# Altium PCB mcu.PcbDoc (part 1 of 2)
Units mil, origin at the board's own origin, x right, y up, seen from the top; angles counter-clockwise.
Board outline 3937.01 x 3937.01 mil, 2 copper layers (Top Layer, Bottom Layer); 92 components, 130 nets, 532 pads, 60 vias.
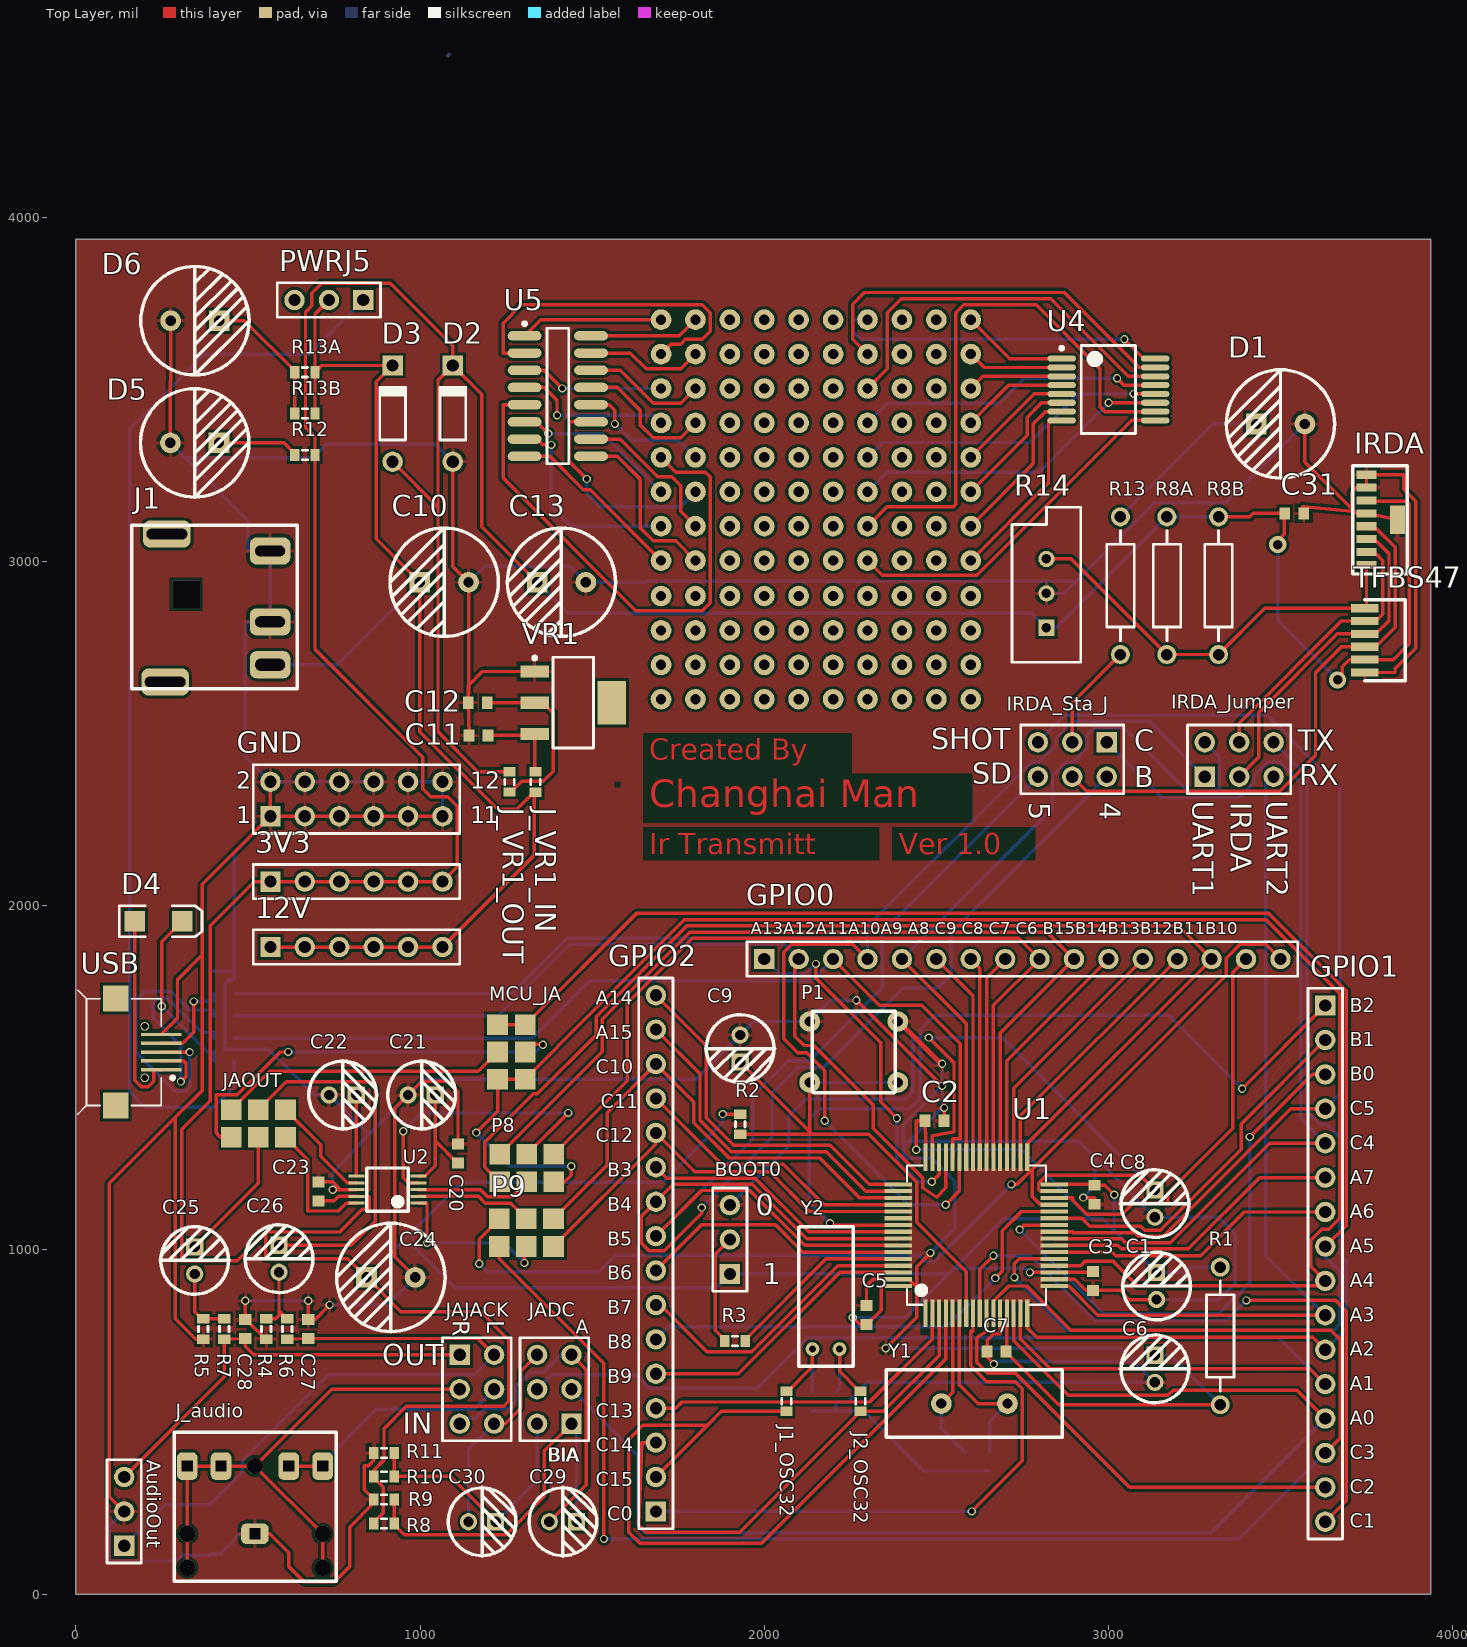
[diagram p0: Top Layer view]
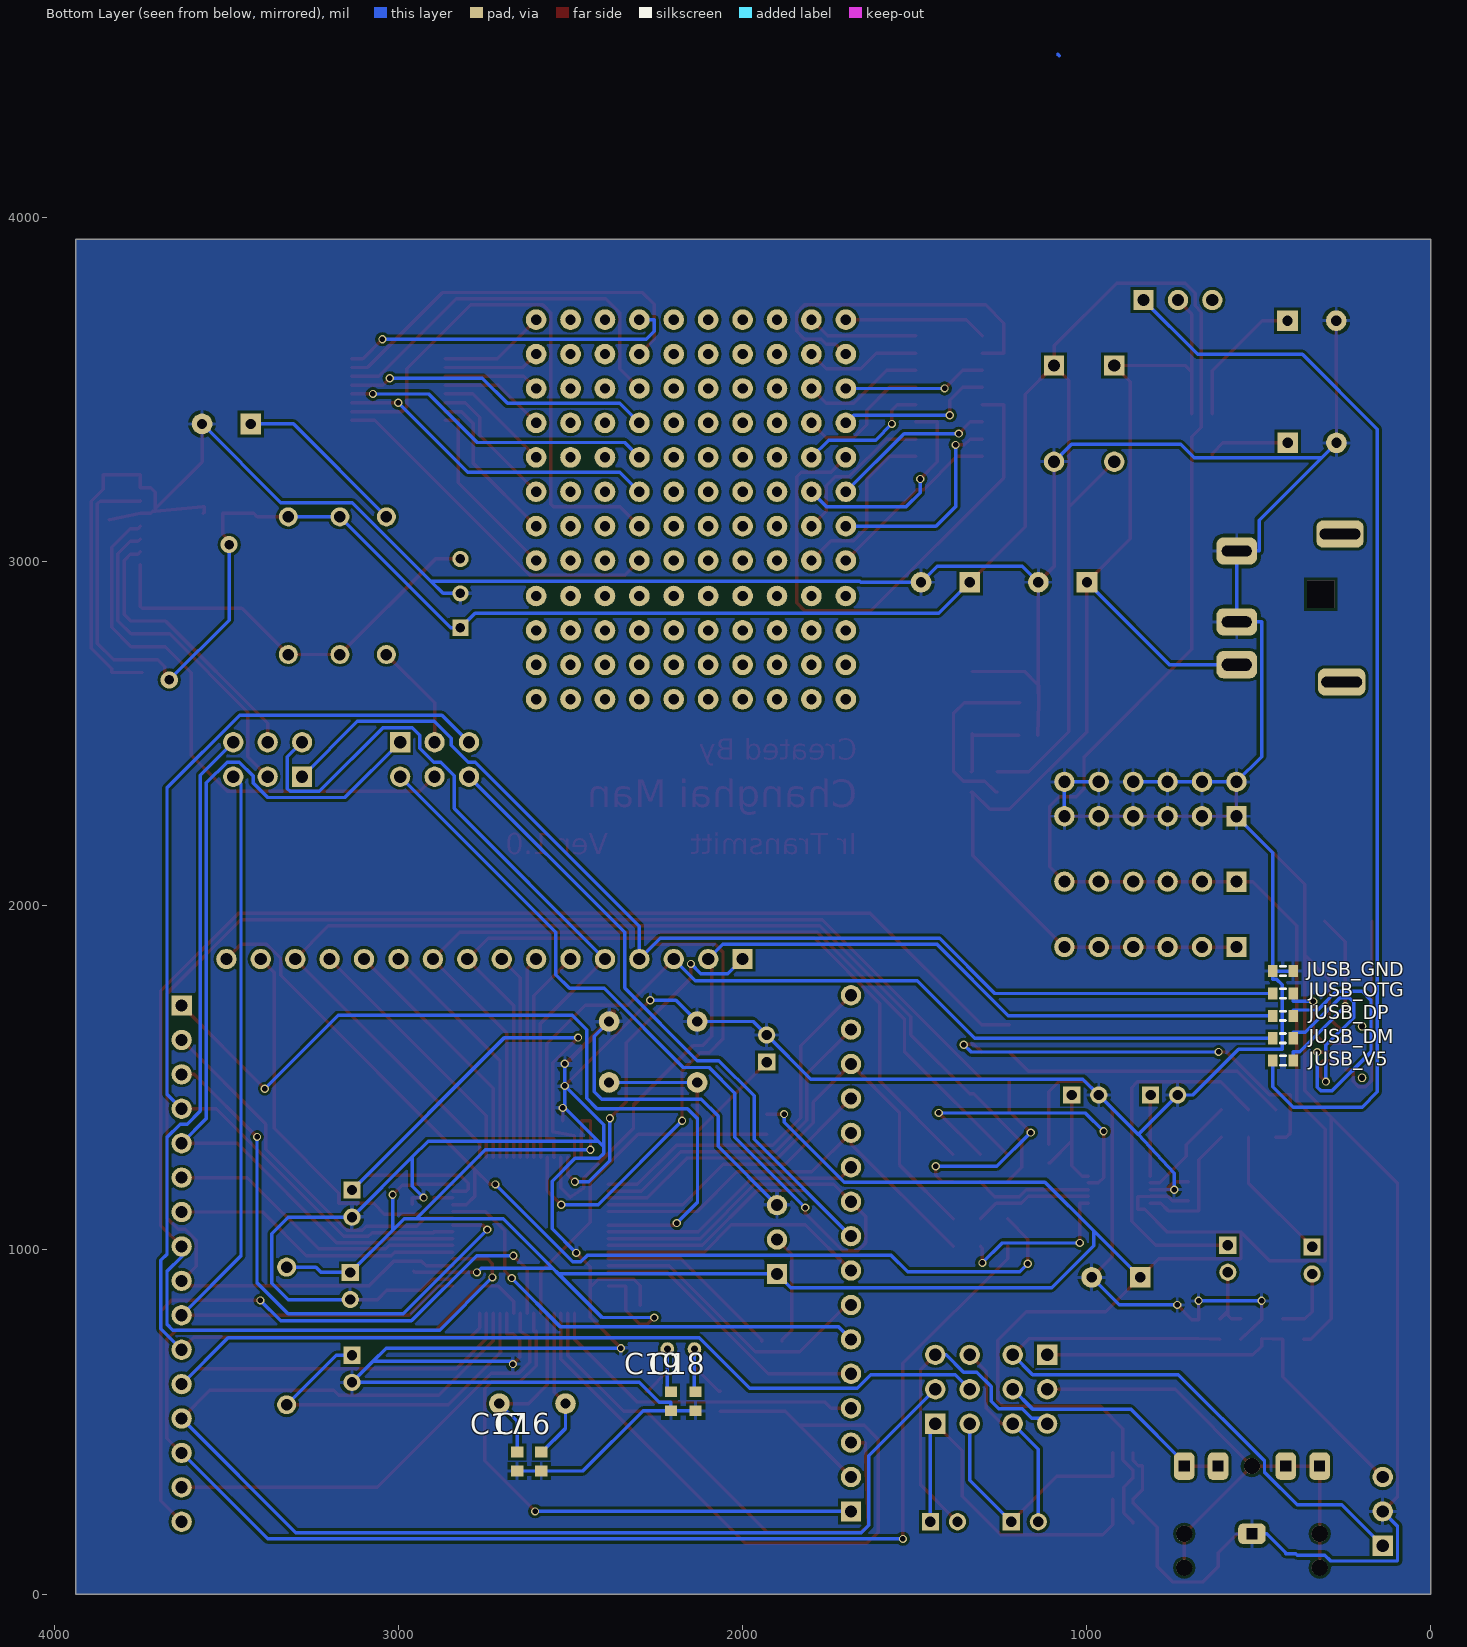
[diagram p1: Bottom Layer view, seen from below]

## Layer stack, top to bottom
Top Solder: solder mask 0.4, Solder Resist, Dk 3.5
Top Layer: signal copper 1.4
Dielectric 1: dielectric 12.6, FR-4, Dk 4.8
Bottom Layer: signal copper 1.4
Bottom Solder: solder mask 0.4, Solder Resist, Dk 3.5

## Board outline
0,0 0,3937.01 3937.01,3937.01 3937.01,0

## Design rules (kind name [scope] priority, off if disabled: settings)
AssemblyTestpoint [All] p1: testpointundercomponent=TRUE minsize=30 maxsize=100 preferedsize=40 minholesize=0 maxholesize=40 preferedholesize=32 testpointgrid=1 usegrid=TRUE gridtolerance=0.01 allowsidetop=TRUE allowsidebottom=TRUE
Clearance [All] p1: gap=8 ignorepadtopadclearanceinfootprint=FALSE except(0: Arc-Hole Track-Hole SMDPad-Hole THPad-Hole Via-Hole Fill-Hole Poly-Hole Region-Hole Text-Hole)
FabricationTestpoint [All] p1: side=3 testpointundercomponent=TRUE minsize=30 maxsize=100 preferedsize=40 minholesize=0 maxholesize=40 preferedholesize=32 testpointgrid=1 allowsidetop=TRUE allowsidebottom=TRUE usegrid=TRUE gridtolerance=0.01
PolygonConnect [All] p1: connectstyle=Relief reliefconductorwidth=10 reliefentries=4 polygonreliefangle="90 Angle" airgapwidth=10
RoutingVias [All] p1: holewidth=16 width=24 viastyle="Through Hole" minholewidth=14 minwidth=20 maxholewidth=28 maxwidth=50
SolderMaskExpansion [All] p1: expansion=4
Width [All] p1: maxlimit=10 minlimit=10 preferedwidth=10
28 further rules are at their usual default settings.

## Classes and differential pairs
component class GPIO: GPIO0 GPIO1 GPIO2
component class power: 3V3 12V C10 C11 C12 C13 D2 D3 D5 D6 GND J1 J_VR1_IN J_VR1_OUT PWRJ5 R12 R13A R13B VR1
component class irda: C31 D1 IRDA IRDA_Jumper IRDA_Sta_J R8A R8B R13 R14 TFBS4711
component class mcuCore: BOOT0 C1 C2 C3 C4 C5 C6 C7 C8 C9 C16 C17 C18 C19 D4 J1_OSC32 J2_OSC32 JUSB_DM JUSB_DP JUSB_GND JUSB_OTG JUSB_V5 P1 P2 R1 R2 R3 U1 USB Y1 Y2
component class audio: AudioOut C20 C21 C22 C23 C24 C25 C26 C27 C28 C29 C30 J_audio JADC JAJACK JAOUT MCU_JA P8 P9 R4 R5 R6 R7 R8 R9 R10 R11 U2

## Components (designator, comment, footprint, x,y, rotation, side; value= is the part's Value field where it differs from the comment)
3V3 "3V3" HDR1X6 565,2070 r0 top
12V "12V" HDR1X6 565,1880 r0 top
AudioOut "Header 3" HDR1X3 140,140 r90 top
BOOT0 "Header 3" HDR1X3 1900,930 r90 top
C1 "Cap2" Cap5x10 3140,895 r270 top value=10uF
C2 "Cap" 1608[0603] 2495,1375 r180 top value=100nF
C3 "Cap" 1608[0603] 2955,910 r90 top value=100nF
C4 "Cap" 1608[0603] 2960,1160 r90 top value=100nF
C5 "Cap" 1608[0603] 2297,811 r270 top value=100nF
C6 "Cap2" Cap5x10 3135,654.37 r270 top value=10uF
C7 "Cap" 1608[0603] 2675,705 r0 top value=100nF
C8 "Cap2" Cap5x10 3135,1134.37 r270 top value=10uF
C9 "Cap2" Cap5x10 1930,1585 r90 top value=10uF
C10 "Cap Pol1" Cap8*14 1070,2940 r180 top value=470uF
C11 "Cap" 1608[0603] 1170,2495 r0 top value=100nF
C12 "Cap" 1608[0603] 1167.44,2590 r0 top value=100nF
C13 "Cap Pol1" Cap8*14 1410.7,2940 r180 top value=470uF
C16 "Cap" 1608[0603] 2585,385 r90 bottom value=22pF
C17 "Cap" 1608[0603] 2655,385 r90 bottom value=22pF
C18 "Cap" 1608[0603] 2136.67,560 r90 bottom value=22pF
C19 "Cap" 1608[0603] 2208.33,560 r90 bottom value=22pF
C20 "Cap" 1608[0603] 1110,1280 r270 top value=100nF
C21 "Cap2" Cap5x10 1004.37,1450 r180 top value=10uF
C22 "Cap2" Cap5x10 775,1450 r180 top value=10uF
C23 "Cap" 1608[0603] 705,1170 r270 top value=100nF
C24 "Cap2" Cap8*14 915,920 r180 top value=470uF
C25 "Cap2" Cap5x10 345,969.37 r270 top value=10uF
C26 "Cap2" Cap5x10 590,974.37 r270 top value=10uF
C27 "Cap" 1608[0603] 675,770 r270 top value=22nF
C28 "Cap" 1608[0603] 492,770 r270 top value=22nF
C29 "Cap2" Cap5x10 1415,210 r180 top value=10uF
C30 "Cap2" Cap5x10 1180,210 r180 top value=10uF
C31 "Cap" 1608[0603] 3540,3140 r180 top value=100nF
D1 "LED0" Cap8*14 3500,3400 r180 top
D2 "Diode 1N4148" DO-35 1095,3430 r90 top
D3 "Diode 1N4148" DO-35 920,3430 r90 top
D4 "1N5819" 3.2X1.6X1.1 240,1955 r0 top
D5 "LED1" Cap8*14 345,3345 r0 top
D6 "LED1" Cap8*14 345.7,3700 r0 top
GND "GND" HDR2X6 565,2260 r0 top
GPIO0 "Header 16" HDR1X16 2000,1845 r0 top
GPIO1 "Header 16" HDR1X16 3630,1710 r270 top
GPIO2 "Header 16" HDR1X16 1685,240 r90 top
IRDA "HSDL3201" HSDL3201 3750,3121.5 r270 top
IRDA_Jumper "Header 3X2" HDR2X3 3280,2375 r0 top
IRDA_Sta_J "Header 3X2" HDR2X3 2995,2475 r180 top
J1 "PWR2.5" PCBComponent_1 564.09,2905 r90 top
J1_OSC32 "Res3" J1-0603 2065,560 r90 top value=0
J2_OSC32 "Res3" J1-0603 2280,560 r90 top value=0
J_audio "Phonejack Stereo SW" AudioJack_3F07 520,37.2 r0 top
J_VR1_IN "Res3" J1-0603 1335,2359.53 r90 top value=0
J_VR1_OUT "Res3" J1-0603 1260,2360 r90 top value=0
JADC "Header 3X2" HDR2X3 1440,495 r90 top
JAJACK "Header 3X2" HDR2X3 1115,695 r270 top
JAOUT "Header 3X2" jumper2x3 530,1407.56 r0 top
JUSB_DM "Res3" J1-0603 430,1615 r180 bottom value=0
JUSB_DP "Res3" J1-0603 430,1680 r180 bottom value=0
JUSB_GND "Res3" J1-0603 430,1810 r180 bottom value=1K
JUSB_OTG "Res3" J1-0603 430,1745 r180 bottom value=0
JUSB_V5 "Res3" J1-0603 430,1550 r180 bottom value=1K
MCU_JA "Header 3X2" jumper2x3 1225,1575 r90 top
P1 "Reset Button" DC_Jack 2260,1575 r180 top
P8 "Header 3X2" jumper2x3 1310,1277.56 r0 top
P9 "Header 3X2" jumper2x3 1308.74,1090 r0 top
PWRJ5 "Header 3" HDR1X3 835,3760 r180 top
R1 "Res2" AXIAL-0.4 3325,750 r270 top value=10
R2 "Res2" J1-0603 1930,1365 r90 top value=10K
R3 "Res2" J1-0603 1915,735 r180 top value=100
R4 "R4" J1-0603 553,770 r90 top value=10K
R5 "Res2" J1-0603 370,770 r90 top value=10K
R6 "Res2" J1-0603 614,770 r270 top value=100
R7 "Res2" J1-0603 431,770 r270 top value=100
R8 "Res2" J1-0603 895,205 r0 top value=10K
R8A "Res2" AXIAL-0.4 3170,2930 r90 top value=100
R8B "Res2" AXIAL-0.4 3320,2930 r90 top value=100
R9 "Res2" J1-0603 895,275 r180 top value=10K
R10 "Res2" J1-0603 895,341.67 r0 top value=10K
R11 "Res2" J1-0603 895,410 r180 top value=10K
R12 "Res3" J1-0603 665,3310 r180 top value=100
R13 "Res2" AXIAL-0.4 3035,2930 r90 top value=100
R13A "Res3" J1-0603 665,3550 r180 top value=1K
R13B "Res3" J1-0603 665,3430 r180 top value=1K
R14 "RPot" VR5 2820,2907.62 r90 top value=1K
TFBS4711 "TFBS4711" TFBS4711 3745,2771.3 r270 top
U1 "Part Number: stm32f4x5rg" LQFP64-10x10mm 2616.38,1042.64 r90 top value=Value
U2 "CS4344" CS4344 905,1175 r180 top
U4 "Comment" SSOP16_N 3000,3500 r0 top
U5 "Comment" SO-16_M 1400,3481 r0 top
USB "Header 5" Micro_USB 30.71,1574.8 r180 top
VR1 "Volt Reg" SOT223_L 1445,2590 r0 top
Y1 "XTAL" XTAL_8M 2610.63,553.35 r0 top
Y2 "XTAL" XTAL_32k 2179.37,711.65 r0 top

## Footprints (in the part's own frame and the unit in brackets; to place one, negate y for a bottom-side part, rotate by r counter-clockwise, add the part's x,y. Pads: shape width x height; smd on the part's side, far side on the other; paste and mask are expansions set on the pad)
3.2X1.6X1.1 [mm] "SMT LED; 2 Flat Leads"
  rect 1.5x1.5 smd: 1(-1.75,0) 2(1.75,0)
  silkscreen extent -2.9,-1.15 3.2,1.15
1608[0603] [mm] "Chip Capacitor, Body 1.6x0.8mm, IPC High Density"
  rect 0.8x0.9 smd: 1(-0.7,0) 2(0.7,0)
  body extent -0.87,-0.48 0.87,0.48, height 1.3
AudioJack_3F07 [mm]
  round 1.2 hole 1.2: 0(-5,1) 0(-5,3.5) 0(0,8.5) 0(5,1) 0(5,3.5)
  rrect50% 2.032x1.524 hole 0.787 square: 1(0,3.5)
  rrect50% 1.524x2.032 hole 0.787 square: 2(-5,8.5) 3(-2.5,8.5) 4(2.5,8.5) 5(5,8.5)
  silkscreen extent -5.97,0 6,11
AXIAL-0.4 [mm] "Axial Device, Thru-Hole; 2 Leads; 0.4 in Pin Spacing"
  round 1.4 hole 0.85: 1(-5.08,0) 2(5.08,0)
  silkscreen extent -4.06,-1.02 4.06,1.02
Cap5x10 [mil]
  rect 50x50 hole 30: 1(-39.37,0)
  round 50 hole 30: 2(39.37,0)
  silkscreen extent -98,-100 98,100
Cap8*14 [mil]
  rect 60x60 hole 30: 1(70.7,0)
  round 60 hole 30: 2(-70.7,0)
  silkscreen extent -157,-157 157,157
CS4344 [mm]
  rect 1.2x0.225 smd: 1(-2.286,1) 2(-2.286,0.5) 3(-2.286,0) 4(-2.286,-0.5) 5(-2.286,-1) 6(2.286,-1) 7(2.286,-0.5) 8(2.286,0) 9(2.286,0.5) 10(2.286,1)
  silkscreen extent -1.52,-1.6 1.52,1.6
DC_Jack [mil]
  round 60 hole 30: 1(-127.95,88.58) 2(127.95,88.58) 3(127.95,-88.58) 4(-127.95,-88.58)
  Top Layer lines w10: -113.11,-118.11 -115.79,-118.11 -119.89,-118.11 -120,-118.11
  silkscreen extent -120,-118 120,118
DO-35 [mm] "Diode, Axial; Body 3.8 x 1.9 mm (LxDia. max), Lead Dia. 0.53 mm (max)"
  round 1.5 hole 0.9: 1(-3.55,0)
  rect 1.5x1.5 hole 0.9: 2(3.55,0)
  silkscreen extent -1.95,-0.95 2.05,0.95
HDR1X3 [mm] "Connector; Header; 3 Position"
  rect 1.5x1.5 hole 0.9: 1(0,0)
  round 1.5 hole 0.9: 2(2.54,0) 3(5.08,0)
  silkscreen extent -1.27,-1.27 6.35,1.27
HDR1X6 [mm] "Connector; Header; 6 Position"
  rect 1.5x1.5 hole 0.9: 1(0,0)
  round 1.5 hole 0.9: 2(2.54,0) 3(5.08,0) 4(7.62,0) 5(10.16,0) 6(12.7,0)
  silkscreen extent -1.27,-1.27 13.97,1.27
HDR1X16 [mm] "Connector; Header; 16 Position"
  rect 1.5x1.5 hole 0.9: 1(0,0)
  round 1.5 hole 0.9: 2(2.54,0) 3(5.08,0) 4(7.62,0) 5(10.16,0) 6(12.7,0) 7(15.24,0) 8(17.78,0) 9(20.32,0) 10(22.86,0) 11(25.4,0) 12(27.94,0) 13(30.48,0) 14(33.02,0) 15(35.56,0) 16(38.1,0)
  silkscreen extent -1.27,-1.27 39.37,1.27
HDR2X3 [mm] "Connector; Header; 3x2 Position"
  rect 1.5x1.5 hole 0.9: 1(0,0)
  round 1.5 hole 0.9: 2(0,2.54) 3(2.54,0) 4(2.54,2.54) 5(5.08,0) 6(5.08,2.54)
  silkscreen extent -1.27,-1.27 6.35,3.81
HDR2X6 [mm] "Connector; Header; 6x2 Position"
  rect 1.5x1.5 hole 0.9: 1(0,0)
  round 1.5 hole 0.9: 2(0,2.54) 3(2.54,0) 4(2.54,2.54) 5(5.08,0) 6(5.08,2.54) 7(7.62,0) 8(7.62,2.54) 9(10.16,0) 10(10.16,2.54) 11(12.7,0) 12(12.7,2.54)
  silkscreen extent -1.27,-1.27 13.97,3.81
HSDL3201 [mm]
  rect 0.6x1.5 smd: 1(-3.325,0) 2(-2.375,0) 3(-1.425,0) 4(-0.475,0) 5(0.475,0) 6(1.425,0) 7(2.375,0) 8(3.325,0)
  rect 2.1x1.1 smd: 9(0,2.286)
  silkscreen extent -4,-1.02 4,3
J1-0603 [mm] "Chip Resistor, Body 1.6x0.8mm, IPC High Density"
  rect 0.7x0.9 smd: 1(-0.75,0) 2(0.75,0)
  silkscreen extent -0.2,-0.35 0.2,0.35, body extent -0.85,-0.48 0.85,0.48, height 0.9
jumper2x3 [mil]
  rect 60x60 smd: 1(-78.74,0) 2(0,0) 3(78.74,0) 4(-78.74,-80) 5(0,-80) 6(78.74,-80)
LQFP64-10x10mm [mil]
  rect 80x12 smd: 1(-226.38,147.64) 2(-226.38,127.95) 3(-226.38,108.27) 4(-226.38,88.58) 5(-226.38,68.9) 6(-226.38,49.21) 7(-226.38,29.53) 8(-226.38,9.84) 9(-226.38,-9.84) 10(-226.38,-29.53) 11(-226.38,-49.21) 12(-226.38,-68.9) 13(-226.38,-88.58) 14(-226.38,-108.27) 15(-226.38,-127.95) 16(-226.38,-147.64) 33(226.38,-147.64) 34(226.38,-127.95) 35(226.38,-108.27) 36(226.38,-88.58) 37(226.38,-68.9) 38(226.38,-49.21) 39(226.38,-29.53) 40(226.38,-9.84) 41(226.38,9.84) 42(226.38,29.53) 43(226.38,49.21) 44(226.38,68.9) 45(226.38,88.58) 46(226.38,108.27) 47(226.38,127.95) 48(226.38,147.64)
  rect 12x80 smd: 17(-147.64,-226.38) 18(-127.95,-226.38) 19(-108.27,-226.38) 20(-88.58,-226.38) 21(-68.9,-226.38) 22(-49.21,-226.38) 23(-29.53,-226.38) 24(-9.84,-226.38) 25(9.84,-226.38) 26(29.53,-226.38) 27(49.21,-226.38) 28(68.9,-226.38) 29(88.58,-226.38) 30(108.27,-226.38) 31(127.95,-226.38) 32(147.64,-226.38) 49(147.64,226.38) 50(127.95,226.38) 51(108.27,226.38) 52(88.58,226.38) 53(68.9,226.38) 54(49.21,226.38) 55(29.53,226.38) 56(9.84,226.38) 57(-9.84,226.38) 58(-29.53,226.38) 59(-49.21,226.38) 60(-68.9,226.38) 61(-88.58,226.38) 62(-108.27,226.38) 63(-127.95,226.38) 64(-147.64,226.38)
  silkscreen extent -202,-202 202,202, body extent 0,0 10,10, height 10
Micro_USB [mm]
  rect 3x0.25 smd: 1(-5.508,1.3) 2(-5.508,0.65) 3(-5.508,0) 4(-5.508,-0.65) 5(-5.508,-1.3)
  round 0.635 hole 0.457 unplated: MH1(-4.3,1.9) MH2(-4.3,-1.9)
  rect 1.9x1.9 smd: ""(-2.15,3.95) ""(-2.15,-3.95)
  silkscreen extent -6.47,-4.57 0.63,4.57
PCBComponent_1 [mm]
  rrect50% 2x3 hole 0.9 slot 2.2 at 90 deg unplated: 1(-5.2,0)
  rrect50% 2x3 hole 0.8 slot 2.2 at 90 deg unplated: 2(-2.032,0) 3(3.2,0)
  rrect50% 2x3.5 hole 0.8 slot 3 at 90 deg unplated: 4(-6.477,7.747) 5(4.445,7.62)
  rect 2x2 hole 2 square: 6(0,6.2)
  Top Layer pour cut-out: -2.413,8.763
  silkscreen extent -6.98,-2 5.08,10.2
SO-16_M [mm] "SOIC, 16-Leads, Body 9.9x3.9mm, Pitch 1.27mm, IPC Low Density"
  oval 2.5x0.7 smd: 1(-2.45,4.445) 2(-2.45,3.175) 3(-2.45,1.905) 4(-2.45,0.635) 5(-2.45,-0.635) 6(-2.45,-1.905) 7(-2.45,-3.175) 8(-2.45,-4.445) 9(2.45,-4.445) 10(2.45,-3.175) 11(2.45,-1.905) 12(2.45,-0.635) 13(2.45,0.635) 14(2.45,1.905) 15(2.45,3.175) 16(2.45,4.445)
  silkscreen extent -2.57,-5 0.8,5.47, body extent -2,-5 2,5, height 1.75
SOT223_L [mm] "SOT223, 4-Leads, Body 6.5x3.5mm, Pitch 2.3mm, Lead Span 7mm, IPC High Density"
  rect 2.1x0.9 smd: 1(-2.85,2.3) 2(-2.85,0) 3(-2.85,-2.3)
  rect 2.1x3.2 smd: 4(2.85,0)
  silkscreen extent -2.97,-3.35 1.5,3.42, body extent -1.85,-3.35 1.85,3.35, height 1.7
SSOP16_N [mm] "SOP, 16-Leads, Body 6.2x5.3mm, Pitch 0.65mm, IPC Medium Density"
  oval 2.1x0.45 smd: 1(-3.45,2.275) 2(-3.45,1.625) 3(-3.45,0.975) 4(-3.45,0.325) 5(-3.45,-0.325) 6(-3.45,-0.975) 7(-3.45,-1.625) 8(-3.45,-2.275) 9(3.45,-2.275) 10(3.45,-1.625) 11(3.45,-0.975) 12(3.45,-0.325) 13(3.45,0.325) 14(3.45,0.975) 15(3.45,1.625) 16(3.45,2.275)
  silkscreen extent -3.57,-3.25 2,3.25, body extent -2.7,-3.25 2.7,3.25, height 2
TFBS4711 [mm]
  rect 0.6x2 smd: 1(-2.37,0) 2(-1.425,0) 3(-0.475,0) 4(0.475,0) 5(1.425,0) 6(2.375,0)
  silkscreen extent -3,0 3,3
VR5 [mm] "Thru-Hole; 3 Leads"
  rect 1.2x1.2 hole 0.7: 1(-2.54,0)
  round 1.2 hole 0.7: 2(0,0) 3(2.54,0)
  silkscreen extent -5.08,-2.54 6.35,2.54
XTAL_8M [mil]
  round 60 hole 30: 1(-96.06,0) 2(96.06,0)
  silkscreen extent -256,-98 256,98
XTAL_32k [mil]
  round 40 hole 20: 1(-39.37,0) 2(39.37,0)
  silkscreen extent -79,-50 79,355

## Part data
3V3 12V: library part "Header 6", "Header, 6-Pin", LatestRevisionDate=17-Jul-2002, LatestRevisionNote="Re-released for DXP Platform.", Publisher="Altium Limited"
AudioOut BOOT0 PWRJ5: "Header, 3-Pin", LatestRevisionDate=17-Jul-2002, LatestRevisionNote="Re-released for DXP Platform.", Publisher="Altium Limited"
C1 C2 C3 C4 C5 C6 C7 C8 C9 C11 C12 C16 C17 C18 C19 C20 C21 C22 C23 C24 C25 C26 C27 C28 C29 C30 C31: "Capacitor", Publisher="Altium Limited"
  C1 C6 C8 C9 C21 C22 C24 C25 C26 C29 C30: PackageDescription="Capacitor; 2 Leads", PackageReference=CAPR5-4X5, Published=23-Sep-2002
  C2 C3 C4 C5 C7 C11 C12 C16 C17 C18 C19 C20 C23 C27 C28 C31: LatestRevisionDate=17-Jul-2002, LatestRevisionNote="Re-released for DXP Platform.", PackageDescription="Radial Cap, Thru-Hole; 2 Leads; 0.3 in Pin Spacing", PackageReference=RAD-0.3, Published=8-Jun-2000
C10 C13: "Polarized Capacitor (Radial)", LatestRevisionDate=17-Jul-2002, LatestRevisionNote="Re-released for DXP Platform.", PackageDescription="Polarized Capacitor (Radial); 2 Leads", PackageReference=RB7.6-15, Published=8-Jun-2000, Publisher="Altium Limited"
D1: "Typical INFRARED GaAs LED", LatestRevisionDate=08-Jul-2005, LatestRevisionNote="Mech Layer 1 removed.", PackageDescription="LED; 2 Leads", PackageReference=LED-0, Published=8-Jun-2000, Publisher="Altium Limited"
D2 D3: "High Conductance Fast Diode", Code_JEDEC=DO-204-AH, ComponentLink1Description="Manufacturer Link", ComponentLink1URL=http://www.fairchildsemi.com/, ComponentLink2Description=Datasheet, ComponentLink2URL=http://www.fairchildsemi.com/ds/1N%2F1N4148.pdf, DatasheetVersion=1997, LatestRevisionDate=17-Jul-2002, LatestRevisionNote="Re-released for DXP Platform.", PackageDescription="Diode, Axial; Body 3.8 x 1.9 mm (LxDia. max), Lead Dia. 0.53 mm (max)", PackageReference=DO-35, Published=8-Jun-2000, Publisher="Altium Limited"
D4: library part "Diode 1N4148", "High Conductance Fast Diode", Code_JEDEC=DO-204-AH, ComponentLink1Description="Manufacturer Link", ComponentLink1URL=http://www.fairchildsemi.com/, ComponentLink2Description=Datasheet, ComponentLink2URL=http://www.fairchildsemi.com/ds/1N%2F1N4148.pdf, DatasheetVersion=1997, LatestRevisionDate=17-Jul-2002, LatestRevisionNote="Re-released for DXP Platform.", PackageDescription="Diode, Axial; Body 3.8 x 1.9 mm (LxDia. max), Lead Dia. 0.53 mm (max)", PackageReference=DO-35, Published=8-Jun-2000, Publisher="Altium Limited"
D5 D6: "Typical RED GaAs LED", LatestRevisionDate=08-Jul-2005, LatestRevisionNote="Mech Layer 1 removed.", PackageDescription="LED; 2 Leads", PackageReference=LED-1, Published=8-Jun-2000, Publisher="Altium Limited"
GND: library part "Header 6X2", "Header, 6-Pin, Dual row", LatestRevisionDate=17-Jul-2002, LatestRevisionNote="Re-released for DXP Platform.", Publisher="Altium Limited"
GPIO0 GPIO1 GPIO2: "Header, 16-Pin", LatestRevisionDate=17-Jul-2002, LatestRevisionNote="Re-released for DXP Platform.", Publisher="Altium Limited"
IRDA_Jumper IRDA_Sta_J JADC JAJACK JAOUT MCU_JA P8 P9: "Header, 3-Pin, Dual row", LatestRevisionDate=17-Jul-2002, LatestRevisionNote="Re-released for DXP Platform.", Publisher="Altium Limited"
J1: "Low Voltage Power Supply Connector", ComponentLink1Description="Manufacturer Link", ComponentLink1URL=http://domino.kycon.com/internet/Products.html, DatasheetDocument=09-May-2002, Published=17-Dec-2003, Publisher="Altium Limited"
J1_OSC32 J2_OSC32 J_VR1_IN J_VR1_OUT JUSB_DM JUSB_DP JUSB_GND JUSB_OTG JUSB_V5 R1 R2 R3 R5 R6 R7 R8 R8A R8B R9 R10 R11 R12 R13 R13A R13B: "Resistor", Published=8-Jun-2000, Publisher="Altium Limited"
  J1_OSC32 J2_OSC32 J_VR1_IN J_VR1_OUT JUSB_DM JUSB_DP JUSB_GND JUSB_OTG JUSB_V5 R12 R13A R13B: LatestRevisionDate=29-May-2009, LatestRevisionNote="IPC-7351 Footprint Added.", PackageDescription="Chip Resistor", PackageReference=J1-0603
  R1 R2 R3 R5 R6 R7 R8 R8A R8B R9 R10 R11 R13: LatestRevisionDate=17-Jul-2002, LatestRevisionNote="Re-released for DXP Platform.", PackageDescription="Axial Device, Thru-Hole; 2 Leads; 0.4 in Pin Spacing", PackageReference=AXIAL-0.4
J_audio: "3-Conductor Jack with 2 break contacts (normals) and 2 auxiliary make contacts", ComponentLink1Description="Manufacturer Link", ComponentLink1URL=http://domino.kycon.com/internet/Products.html, DatasheetDocument=07-Mar-2000, LatestRevisionDate=17-Dec-2003, LatestRevisionNote="PCB Footprint replaced.", Published=5-Jan-2004, Publisher="Altium Limited"
P1: library part "Header 2X2", "Header, 2-Pin, Dual row", LatestRevisionDate=17-Jul-2002, LatestRevisionNote="Re-released for DXP Platform.", Publisher="Altium Limited"
R4: library part Res2, "Resistor", LatestRevisionDate=17-Jul-2002, LatestRevisionNote="Re-released for DXP Platform.", PackageDescription="Axial Device, Thru-Hole; 2 Leads; 0.4 in Pin Spacing", PackageReference=AXIAL-0.4, Published=8-Jun-2000, Publisher="Altium Limited"
R14: "Potentiometer", LatestRevisionDate=17-Jul-2002, LatestRevisionNote="Re-released for DXP Platform.", PackageDescription="Variable Resistor, Thru-Hole; 3 Leads", PackageReference=VR5, Published=8-Jun-2000, Publisher="Altium Limited", Set Position=0.5, Sim Note="Enter the Resistance value and the set point into parameter fields."
U1: library part STM32F4x5RG, "No Description Available", Manufacturer_Part_Number=stm32f4x5rg, Copyright="Copyright (C) 2016 Accelerated Designs. All rights reserved", RefDes=RefDes, Type=DEV, Vendor=STMicroelectronics
USB: "Header, 5-Pin", LatestRevisionDate=17-Jul-2002, LatestRevisionNote="Re-released for DXP Platform.", Publisher="Altium Limited"
VR1: "Voltage Regulator", LatestRevisionDate=29-May-2009, LatestRevisionNote="IPC-7351 Footprint Added.", PackageDescription="3-Pin Transistor Outline Package 2.54 mm Pitch, 15.1 mm Lead Span", PackageReference=D2PAK, Published=24-Mar-1999, Publisher="Altium Limited"
Y1 Y2: "Crystal Oscillator", LatestRevisionDate=17-Jul-2002, LatestRevisionNote="Re-released for DXP Platform.", PackageDescription="Crystal, Thru-Hole; 2 Leads; Body 3.1 x 8.2 mm (Dia.xH)", PackageReference=R38, Published=8-Jun-2000, Publisher="Altium Limited"

## Free pads (board coordinates)
  round 60 hole 30: 3(1800,2600) 3(1800,2700) 3(1800,2800) 3(1800,2900) 3(1800,3003) 3(1800,3103) 3(1800,3203) 3(1800,3303) 3(1800,3403) 3(1800,3503) 3(1800,3603) 3(1800,3703) 4(1900,2600) 4(1900,2700) 4(1900,2800) 4(1900,2900) 4(1900,3003) 4(1900,3103) 4(1900,3203) 4(1900,3303) 4(1900,3403) 4(1900,3503) 4(1900,3603) 4(1900,3703) 5(2000,2600) 5(2000,2700) 5(2000,2800) 5(2000,2900) 5(2000,3003) 5(2000,3103) 5(2000,3203) 5(2000,3303) 5(2000,3403) 5(2000,3503) 5(2000,3603) 5(2000,3703) 6(2100,2600) 6(2100,2700) 6(2100,2800) 6(2100,2900) 6(2100,3003) 6(2100,3103) 6(2100,3203) 6(2100,3303) 6(2100,3403) 6(2100,3503) 6(2100,3603) 6(2100,3703) 7(2200,2600) 7(2200,2700) 7(2200,2800) 7(2200,2900) 7(2200,3003) 7(2200,3103) 7(2200,3203) 7(2200,3303) 7(2200,3403) 7(2200,3503) 7(2200,3603) 7(2200,3703) 8(2300,2600) 8(2300,2700) 8(2300,2800) 8(2300,2900) 8(2300,3003) 8(2300,3103) 8(2300,3203) 8(2300,3303) 8(2300,3403) 8(2300,3503) 8(2300,3603) 8(2300,3703) 9(2400,2600) 9(2400,2700) 9(2400,2800) 9(2400,2900) 9(2400,3003) 9(2400,3103) 9(2400,3203) 9(2400,3303) 9(2400,3403) 9(2400,3503) 9(2400,3603) 9(2400,3703) 10(2500,2600) 10(2500,2700) 10(2500,2800) 10(2500,2900) 10(2500,3003) 10(2500,3103) 10(2500,3203) 10(2500,3303) 10(2500,3403) 10(2500,3503) 10(2500,3603) 10(2500,3703) 11(2600,2600) 11(2600,2700) 11(2600,2800) 11(2600,2900) 11(2600,3003) 11(2600,3103) 11(2600,3203) 11(2600,3303) 11(2600,3403) 11(2600,3503) 11(2600,3603) 11(2600,3703) 12(1700,2600) 12(1700,2700) 12(1700,2800) 12(1700,2900) 12(1700,3003) 12(1700,3103) 12(1700,3203) 12(1700,3303) 12(1700,3403) 12(1700,3503) 12(1700,3603) 12(1700,3703)

## Via types
v1: diameter 24, hole 16, Top Layer to Bottom Layer, 58 vias
v2: diameter 50, hole 28, Top Layer to Bottom Layer, 2 vias

## Nets (pads, with @x,y where several pads share a name; then routed paths per layer and width w, separated by ;. In a path a pad name is that pad's centre, name@x,y a point inside that pad or via, vN(x,y) a via of type N, cw(c..) or ccw(c..) an arc to the next point about the centre after c; other vN are vias at no path point)
+5: JUSB_V5.1 PWRJ5.1 | length 3182.2
  Bottom Layer w10: JUSB_V5.1@459.53,1550 459.53,1474.53 400,1415 200,1415 156,1459 156,3385 373,3602 677,3602 PWRJ5.1@835,3760
+12: 12V.1 12V.2 12V.3 12V.4 12V.5 12V.6 C10.1 D3.2 J1.1 J_VR1_IN.1 PWRJ5.2 R13A.1 R13B.1 | length 3760.9
  Top Layer w10: 12V.1@565,1880 12V.2@665,1880 12V.3@765,1880 12V.4@865,1880 12V.5@965,1880 12V.6@1065,1880 1331,2146 J_VR1_IN.1@1331,2330 ; R13B.1@694.53,3430 R13A.1@694.53,3550 ; PWRJ5.2@735,3760 694.53,3719.53 R13A.1@694.53,3550 ; J_VR1_IN.1@1335,2330 J_VR1_IN.1@1331,2330 ; R13A.1@694.53,3550 714.29,3569.76 D3.2@920,3569.76 873,3522.76 873,3066.3 C10.1@999.3,2940 999.3,2505.7 1225,2280 1281,2280 J_VR1_IN.1@1331,2330
  Bottom Layer w10: J1.1@564.09,2700.28 759.58,2700.28 C10.1@999.3,2940
AIN1: C29.2 JADC.5 JAJACK.5 | length 980.3
  Top Layer w10: C29.2@1375.63,210 1483,317.37 1483,652 JADC.5@1440,695
  Bottom Layer w10: JAJACK.5@1115,495 1131,511 1160,511 1187,538 1256,538 1278,560 1278,603 1320,645 1358,645 1408,695 JADC.5@1440,695
AIN1_ADC: GPIO1.13 JADC.3 U1.14 | length 3710.6
  Top Layer w10: U1.14@2724.65,816.26 2724.65,735.35 2883,577 3173,577 3188,592 3548,592 GPIO1.13@3630,510
  Bottom Layer w10: JADC.3@1440,595 1633,402 1633,200 1655,178 3298,178 GPIO1.13@3630,510
AIN1_BIAS: C29.1 JADC.1 R8.2 R9.1 | length 1104
  Top Layer w10: R9.1@924.53,275 R8.2@924.53,205 924.53,201.06 953.59,172 1249.75,172 1361.28,283.52 1361.28,416.28 JADC.1@1440,495
  Bottom Layer w10: JADC.1@1440,495 1454.37,480.63 C29.1@1454.37,210
AIN2: C30.2 JADC.6 JAJACK.6 | length 586.3
  Top Layer w10: JAJACK.6@1215,495 1247,495 1292,540 1292,647 JADC.6@1340,695
  Bottom Layer w10: C30.2@1140.63,210 1140.63,420.63 JAJACK.6@1215,495
AIN2_ADC: GPIO1.12 JADC.4 U1.15 | length 3455.6
  Top Layer w10: U1.15@2744.33,816.26 2744.33,742 2831.33,655 3585,655 GPIO1.12@3630,610
  Bottom Layer w10: JADC.4@1340,595 1382.53,637.53 1627.33,637.53 1667.38,597.47 1979.15,597.47 2126.33,744.65 3495.35,744.65 GPIO1.12@3630,610
AIN2_BIAS: C30.1 JADC.2 R10.2 R11.1 | length 752.7
  Top Layer w10: R11.1@924.53,410 R10.2@924.53,341.67 1087.7,341.67 C30.1@1219.37,210
  Bottom Layer w10: C30.1@1219.37,210 1340,330.63 JADC.2@1340,495
AOUTL: AudioOut.1 C27.2 JAJACK.2 R6.2 | length 1944.9
  Top Layer w10: R6.2@614,740.47 C27.2@675,742.44 1167.56,742.44 JAJACK.2@1215,695
  Bottom Layer w10: AudioOut.1@140,140 259.29,259.29 388.61,259.29 483.38,354.06 483.38,387.02 733.89,637.53 1157.53,637.53 JAJACK.2@1215,695
AOUTL_B: C26.1 JAOUT.2 | length 1076.3
  Top Layer w10: JAOUT.2@530,1407.56 610.44,1488 853,1488 869.62,1471.38 869.62,1083.36 800,1013.74 C26.1@590,1013.74
AOUTR: AudioOut.3 C28.2 JAJACK.1 R7.2 | length 1237.8
  Top Layer w10: AudioOut.3@140,340 431,631 R7.2@431,740.47 C28.2@492,742.44 492,720 517,695 JAJACK.1@1115,695
AOUTR_B: C25.1 JAOUT.5 | length 395.4
  Top Layer w10: C25.1@345,1008.74 530,1193.74 JAOUT.5@530,1327.56
BOOT0: R3.1 U1.60 | length 546.7
  Top Layer w10: R3.1@1944.53,735 1944.53,738.94 2179.33,973.74 U1.60@2390,973.74
DAC_AOUTL: JAOUT.3 U2.7 | length 314
  Top Layer w10: JAOUT.3@608.74,1407.56 710.71,1305.59 710.71,1272.23 788.25,1194.69 U2.7@815,1194.69
DAC_AOUTR: JAOUT.6 U2.10 | length 392
  Top Layer w10: JAOUT.6@608.74,1327.56 674,1262.3 674,1113 762.37,1113 785,1135.63 U2.10@815,1135.63
DAC_CK: P9.2 U2.2 | length 340.8
  Top Layer w10: U2.2@995,1155.32 1169.66,1155.32 1189.82,1135.16 1263.58,1135.16 P9.2@1308.74,1090
DAC_MCK: P8.2 U2.4 | length 856.4
  Top Layer w10: v1(951,1345) 951,1210 966.31,1194.69 U2.4@995,1194.69 ; P8.2@1310,1277.56 v1(1430.22,1397.78)
  Bottom Layer w10: v1(951,1345) 1003.78,1397.78 v1(1430.22,1397.78)
DAC_OUT1: GPIO1.9 MCU_JA.1 MCU_JA.4 P8.6 U1.20 | length 5037.1
  Top Layer w10: v1(1163,1341) 1225,1403 MCU_JA.1@1225,1496.26 MCU_JA.4@1305,1496.26 1493.48,1684.74 1493.48,1684.99 1768.02,1959.53 3457.91,1959.53 3672.53,1744.91 3672.53,1092.38 3640.14,1060 3619.86,1060 3587.47,1027.62 3587.47,952.53 GPIO1.9@3630,910 3616.37,896.37 3084.31,896.37 3014.37,966.31 2931.9,966.31 2919.65,954.06 U1.20@2842.76,954.06 ; P8.6@1388.74,1197.56 1420,1197.56 1439,1216.56 v1(1439,1243)
  Bottom Layer w10: v1(1163,1341) 1261,1243 v1(1439,1243)
DAC_OUT2: GPIO1.8 MCU_JA.3 MCU_JA.6 U1.21 | length 4881.6
  Top Layer w10: MCU_JA.3@1225,1653.74 MCU_JA.6@1305,1653.74 1628.79,1977.53 3465.37,1977.53 3690.53,1752.37 3690.53,1070.53 GPIO1.8@3630,1010 ; v1(2727,920) 2727,959.92 2740.82,973.74 U1.21@2842.76,973.74
  Bottom Layer w10: v1(2727,920) 2880,767 3656,767 3672.53,783.53 3672.53,937.47 3630,980 GPIO1.8@3630,1010
DAC_SD: P9.5 U2.1 | length 498
  Top Layer w10: U2.1@995,1135.63 1020,1135.63 v1(1020,1020) ; v1(1303,962) 1303,1004.26 P9.5@1308.74,1010
  Bottom Layer w10: v1(1020,1020) 1245,1020 v1(1303,962)
DAC_WS: P8.5 U2.3 | length 341.3
  Top Layer w10: U2.3@995,1175 1175.44,1175 1195.88,1154.56 1267,1154.56 P8.5@1310,1197.56
GND: AudioOut.2 BOOT0.3 C1.2 C2.1 C3.1 C4.1 C5.1 C6.2 C7.1 C8.2 C9.2 C10.2 C11.1 C12.1 C13.2 C16.1 C17.1 C18.1 C19.1 C20.1 C21.2 C22.2 C23.1 C24.2 C27.1 C28.1 C31.1 D1.2 D2.1 D5.2 D6.2 GND.1 GND.2 GND.3 GND.4 GND.5 GND.6 GND.7 GND.8 GND.9 GND.10 GND.11 GND.12 IRDA.1 IRDA.2 IRDA.4 IRDA.9 J1.2 J1.3 J_audio.1 JUSB_GND.1 JUSB_GND.2 P1.3 P1.4 R4.1 R5.1 R9.2 R11.2 R14.2 TFBS4711.6 U1.12 U1.18 U1.63 U2.8 USB.5 VR1.1 | length 26546.9
  Top Layer w10: AudioOut.2@140,240 97,283 97,1193 289,1385 ; USB.5@247.56,1625.98 295,1673.43 295,1785 367,1857 ; D5.2@274.3,3345 274.3,3522 275,3522.7 D6.2@275,3700 ; R5.1@370,740.47 348.53,740.47 289,800 289,1385 ; v1(492,852) C28.1@492,797.56 R4.1@553,740.47 ; J_audio.1@520,175 563,175 618,120 618,80 663,35 750,35 795,80 795,194.53 865.47,265 R9.2@865.47,275 838,302.47 838,373 850,373 865.47,388.47 R11.2@865.47,410 ; GND.2@565,2360 GND.1@565,2260 ; v1(675,852) C27.1@675,797.56 694.56,797.56 v1(737,840) ; C23.1@705,1197.56 746.05,1197.56 768.61,1175 ; v1(746.05,1175) 768.61,1175 ; U2.8@815,1175 768.61,1175 ; C24.2@985.7,920 926,979.7 926,1411 C21.2@965,1450 1005,1490 1080,1490 1110,1460 C20.1@1110,1307.56 ; GND.11@1065,2260 GND.9@965,2260 GND.7@865,2260 GND.5@765,2260 GND.3@665,2260 GND.1@565,2260 ; D2.1@1095,3290.24 1095,2985.7 C10.2@1140.7,2940 1140.7,2640.82 ; C11.1@1142.44,2495 C12.1@1139.88,2590 ; VR1.1@1332.8,2680.55 1180.43,2680.55 1140.7,2640.82 ; v1(2268,1725) v1(2516.53,1476.47) ; C5.1@2297,838.56 2297,895.83 2315.86,914.69 U1.63@2390,914.69 2420,914.69 2443,891.69 ; v1(2353.34,714.49) 2443,804.15 2443,891.69 ; 2373.11,1693.11 2373.11,1684.45 P1.4@2380,1677.56 ; 2380,1693.11 P1.4@2380,1677.56 ; P1.4@2387.95,1663.58 2510.45,1541.08 v1@2516.76,1541.08 ; v1(2483,991) 2443,951 2443,891.69 ; v1(2516.53,1541.03) P1.4@2380,1677.56 ; C2.1@2522.56,1375 v1(2522.56,1412.53) ; v1(2667.44,668.35) 2647.44,688.35 C7.1@2647.44,705 2647.44,737.72 2666.29,756.56 2685.28,756.56 U1.12@2685.28,816.26 ; U1.18@2842.76,914.69 2902.45,914.69 2934.7,882.44 C3.1@2955,882.44 3034,882.44 3060.81,855.63 C1.2@3140,855.63 ; v1(2927,1152) 2960,1152 C4.1@2960,1132.44 ; C31.1@3567.56,3140 3564.8,3142.76 3564.8,3160.13 3569.07,3159.51 3569.5,3159.86 3705.71,3146.53 3714.07,3146.13 3720,3140.2 IRDA.4@3750,3140.2 IRDA.9@3840,3121.5 ; D1.2@3570.7,3400 3570.7,3289.5 3707,3153.2 3707,3202 3720,3215 IRDA.2@3750,3215 IRDA.1@3750,3252.4 3858,3252.4 3858,3210.33 3892.65,3175.68 3892.65,2748.67 3832.8,2688.81 3832.8,2677.8 TFBS4711.6@3745,2677.8 ; 289,1385 367,1463 367,1857 ; 367,1857 367,2062 GND.1@565,2260 ; C12.1@1139.88,2590 1140.7,2640.82 ; C12.1@1139.88,2590 1139.88,2640 1140.7,2640.82
  Bottom Layer w10: AudioOut.2@140,240 97,197 97,96 290.78,96 307.98,113.2 388.8,113.2 392.67,117.06 422,117.06 422,120 477,175 J_audio.1@520,175 ; D5.2@274.3,3345 317.3,3302 ; JUSB_GND.2@400.47,1810 JUSB_GND.1@459.53,1810 ; v1(492,852) v1(675,852) ; J1.2@564.09,2825 J1.2@564,2825 ; J1.3@564.09,3030.98 J1.3@564,3030.98 ; GND.1@565,2260 459.53,2154.53 JUSB_GND.1@459.53,1810 ; v1(737,840) 905.7,840 C24.2@985.7,920 ; v1(746.05,1175) 746.05,1222.63 850.32,1335.32 ; GND.8@865,2360 GND.6@765,2360 GND.4@665,2360 GND.2@565,2360 492,2433 492,2825 J1.2@564,2825 ; GND.10@965,2360 GND.12@1065,2360 GND.11@1065,2260 ; D2.1@1095,3290.24 1044.24,3341 727,3341 688,3302 317.3,3302 ; C10.2@1140.7,2940 1187.7,2987 1434.4,2987 C13.2@1481.4,2940 1657,2940 1660,2943 2906,2943 ; BOOT0.3@1900,1130 2071.05,1301.05 2071.05,1389.05 2120,1438 2409,1438 2431,1460 2431,1620.53 P1.4@2387.95,1663.58 ; C18.1@2136.67,532.44 C19.1@2208.33,532.44 ; v1(2268,1725) 2193.47,1725 P1.3@2132.05,1663.58 1969.21,1663.58 C9.2@1930,1624.37 1801.63,1496 1011,1496 C21.2@965,1450 850.32,1335.32 ; v1(2353.34,714.49) 3035.51,714.49 3074.02,675.98 ; v1(2483,991) 2553,1061 2553,1200 2487,1266 2418,1266 2404,1280 2404,1300 ; v1(2516.53,1541.03) 2516.59,1541.08 2516.76,1541.08 2516.53,1540.86 v1(2516.53,1476.47) ; v1(2522.56,1412.53) v1@2516.53,1412.53 ; C17.1@2655,357.44 C16.1@2585,357.44 2464,357.44 2289,532.44 C19.1@2208.33,532.44 ; v1(2667.44,668.35) 2667.44,675.98 3074.02,675.98 ; R14.2@2820,2907.62 2870.62,2907.62 2906,2943 ; v1(2927,1152) 2960,1185 2960,1270 ; C1.2@3140,855.63 3320.63,855.63 3368,903 3368,1047 3320,1095 C8.2@3135,1095 2960,1270 ; D1.2@3570.7,3400 3341.7,3171 3134,3171 2906,2943 ; 317.3,3302 499.02,3120.28 499.02,3030.98 J1.3@564,3030.98 ; JUSB_GND.1@459.53,1810 459.53,1787 449,1787 432,1770 432,1583 559,1583 692,1450 C22.2@735.63,1450 850.32,1335.32 ; J1.2@564,2825 J1.3@564,3030.98 ; C19.1@2208.33,532.44 2208.33,557 2242,557 2300,615 C6.2@3135,615 3074.02,675.98 ; 2404,1300 2404,1363.93 v1(2516.53,1476.47) ; 2404,1300 2420,1316 ; 2420,1316 v1@2516.53,1412.53 ; 2420,1316 2914,1316 2960,1270 ; v1@2516.53,1412.53 v1(2516.53,1476.47)
I2S2_CK: GPIO0.16 P9.1 U1.29 | length 3103
  Top Layer w10: v1(1171.44,960) 1171.44,1031.44 P9.1@1230,1090 ; v1(2718.21,1190.12) 2734.5,1190.12 2778.9,1234.51 ; U1.29@2842.76,1131.22 2802.76,1131.22 2778.9,1155.08 2778.9,1234.51 ; GPIO0.16@3500,1845 3457.47,1887.53 3382.38,1887.53 3342.53,1847.67 3342.53,1798.14 2778.9,1234.51
  Bottom Layer w10: v1(1171.44,960) 1195.16,936.29 1520.29,936.29 1569,985 2450.03,985 2470,965.03 2493.13,965.03 v1(2718.21,1190.12)
I2S2_MCK: GPIO0.10 P8.1 U1.37 | length 2689
  Top Layer w10: P8.1@1231.26,1277.56 1529.48,1575.78 1529.48,1670.08 1782.93,1923.53 2821.47,1923.53 GPIO0.10@2900,1845 2685.28,1630.28 U1.37@2685.28,1269.02
I2S2_SD: GPIO1.14 P9.4 U1.11 | length 4647.6
  Top Layer w10: P9.4@1230,1010 1230,974.33 1534,670.33 v1(1534,160) ; U1.11@2665.59,816.26 2665.59,850.59 2710,895 2763,895 2891,767 3646,767 3673,740 3673,453 GPIO1.14@3630,410
  Bottom Layer w10: v1(1534,160) 3380,160 GPIO1.14@3630,410
I2S2_WS: GPIO0.14 P8.4 U1.33 | length 3374.4
  Top Layer w10: P8.4@1231.26,1197.56 1188.26,1240.56 1188.26,1312.94 1328.58,1453.26 1340.38,1453.26 1511.48,1624.36 1511.48,1677.54 1775.47,1941.53 3203.47,1941.53 GPIO0.14@3300,1845 2764.02,1309.02 U1.33@2764.02,1269.02
I2S3_CK: GPIO2.14 P9.3 U1.51 | length 1474.7
  Top Layer w10: P9.3@1387.48,1090 1544.05,1246.57 1544.05,1399.05 GPIO2.14@1685,1540 1795.26,1429.74 1795.26,1369.42 1897.68,1267 2160.71,1267 2276.81,1150.91 U1.51@2390,1150.91
I2S3_MCK: GPIO0.9 P8.3 U1.38 | length 2460.7
  Top Layer w10: P8.3@1388.74,1277.56 1602.06,1490.88 1602.06,1717.21 1790.38,1905.53 2739.47,1905.53 GPIO0.9@2800,1845 2665.59,1710.59 U1.38@2665.59,1269.02
I2S3_SD: GPIO2.12 P9.6 U1.53 | length 1252.9
  Top Layer w10: P9.6@1387.48,1010 1685,1307.52 GPIO2.12@1685,1340 1798.47,1226.53 2016.38,1226.53 2131.37,1111.54 U1.53@2390,1111.54
IRDA_RXD: IRDA.6 IRDA_Jumper.3 TFBS4711.3 | length 976.6
  Top Layer w10: IRDA_Jumper.3@3380,2375 3437.47,2432.47 3437.47,2562.47 3665,2790 TFBS4711.3@3745,2790 3777.16,2790 3815.37,2828.21 3815.37,3022.35 3779.13,3058.58 3756.81,3058.58 IRDA.6@3750,3065.39
IRDA_SD: IRDA.5 IRDA_Sta_J.4 TFBS4711.4 | length 1635.8
  Top Layer w10: IRDA_Sta_J.4@2895,2375 2937.53,2332.47 3497.62,2332.47 3601.82,2436.68 3601.82,2677.21 3677.21,2752.6 TFBS4711.4@3745,2752.6 3777.16,2752.6 3833.37,2808.8 3833.37,3041.75 3779.13,3095.99 3756.81,3095.99 IRDA.5@3750,3102.8
IRDA_SHOT: IRDA_Sta_J.3 R13.1 | length 313
  Top Layer w10: IRDA_Sta_J.3@2895,2475 2895,2590 R13.1@3035,2730
IRDA_TXD: IRDA.7 IRDA_Jumper.4 TFBS4711.2 | length 817.4
  Top Layer w10: IRDA_Jumper.4@3380,2475 3380,2530.51 3676.89,2827.4 TFBS4711.2@3745,2827.4 3777.36,2827.4 3797.37,2847.41 3797.37,3002.94 3779.13,3021.18 3756.81,3021.18 IRDA.7@3750,3027.99
MCU_AOUTL: JAOUT.1 MCU_JA.2 | length 843.1
  Top Layer w10: JAOUT.1@451.26,1407.56 562.87,1519.17 1169.17,1519.17 MCU_JA.2@1225,1575